# Altium PCB board.PcbDoc
Units mm, origin at the board's own origin, x right, y up, seen from the top; angles counter-clockwise.
Board outline 77.25 x 40 mm, 2 copper layers (Top Layer, Bottom Layer); 10 components, 19 nets, 89 pads, 0 vias.
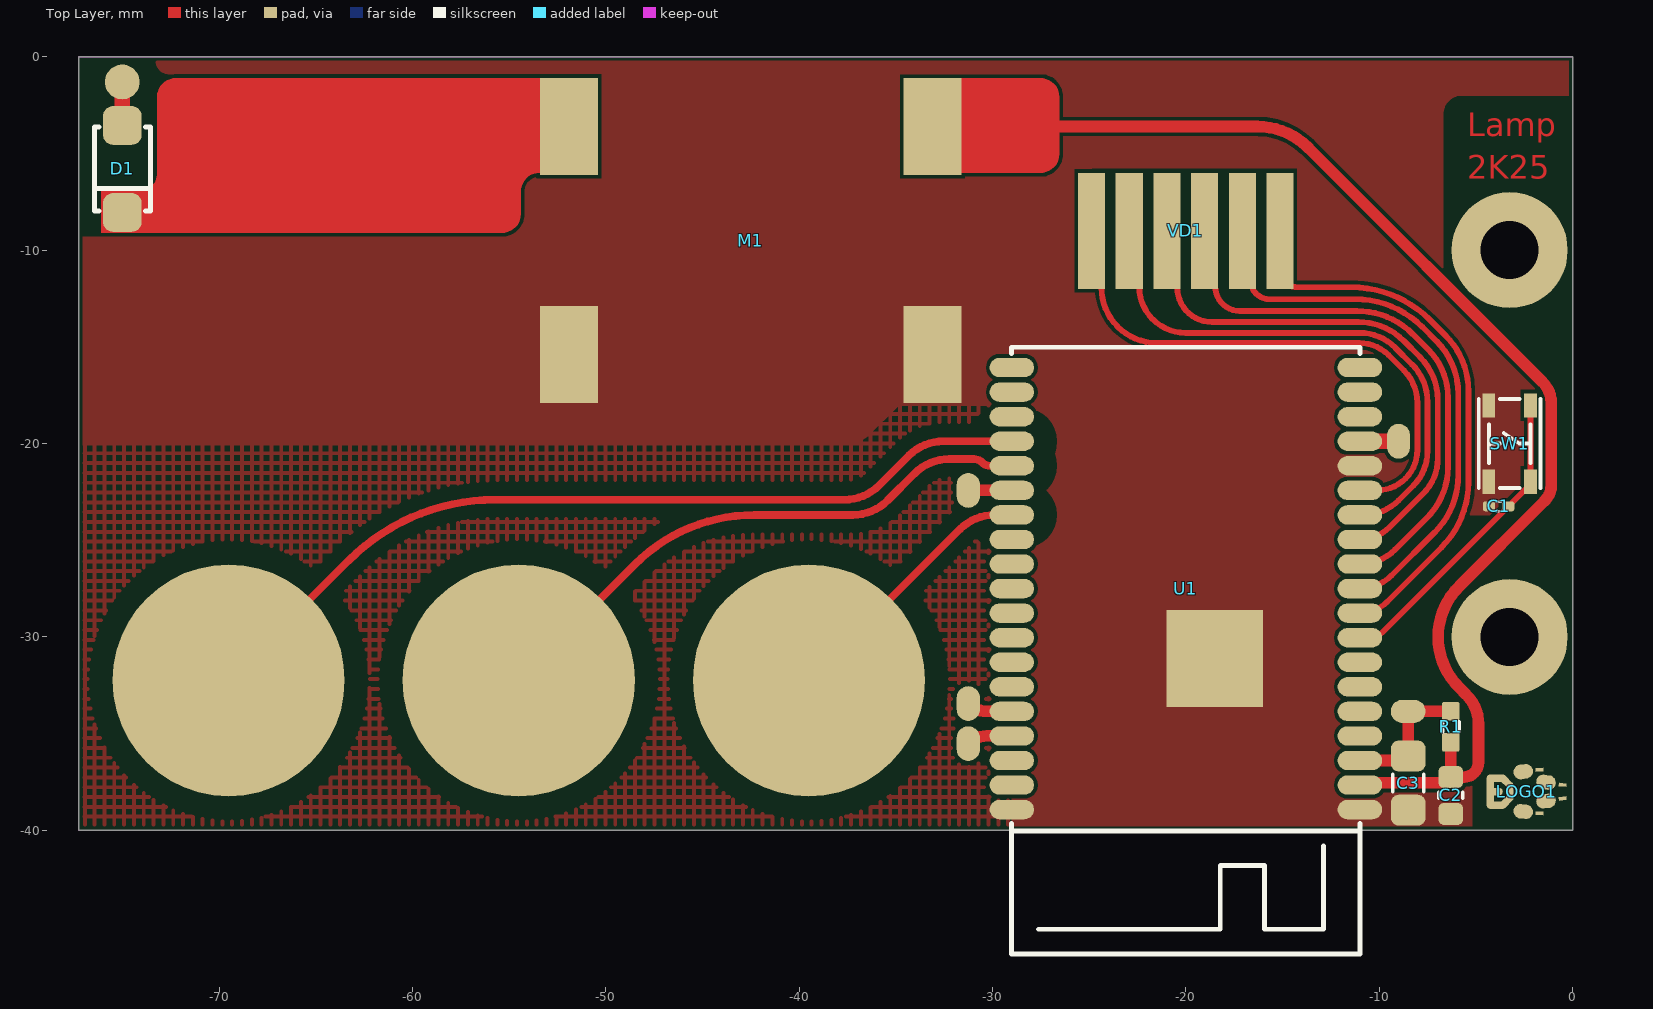
[diagram p0: Top Layer view]
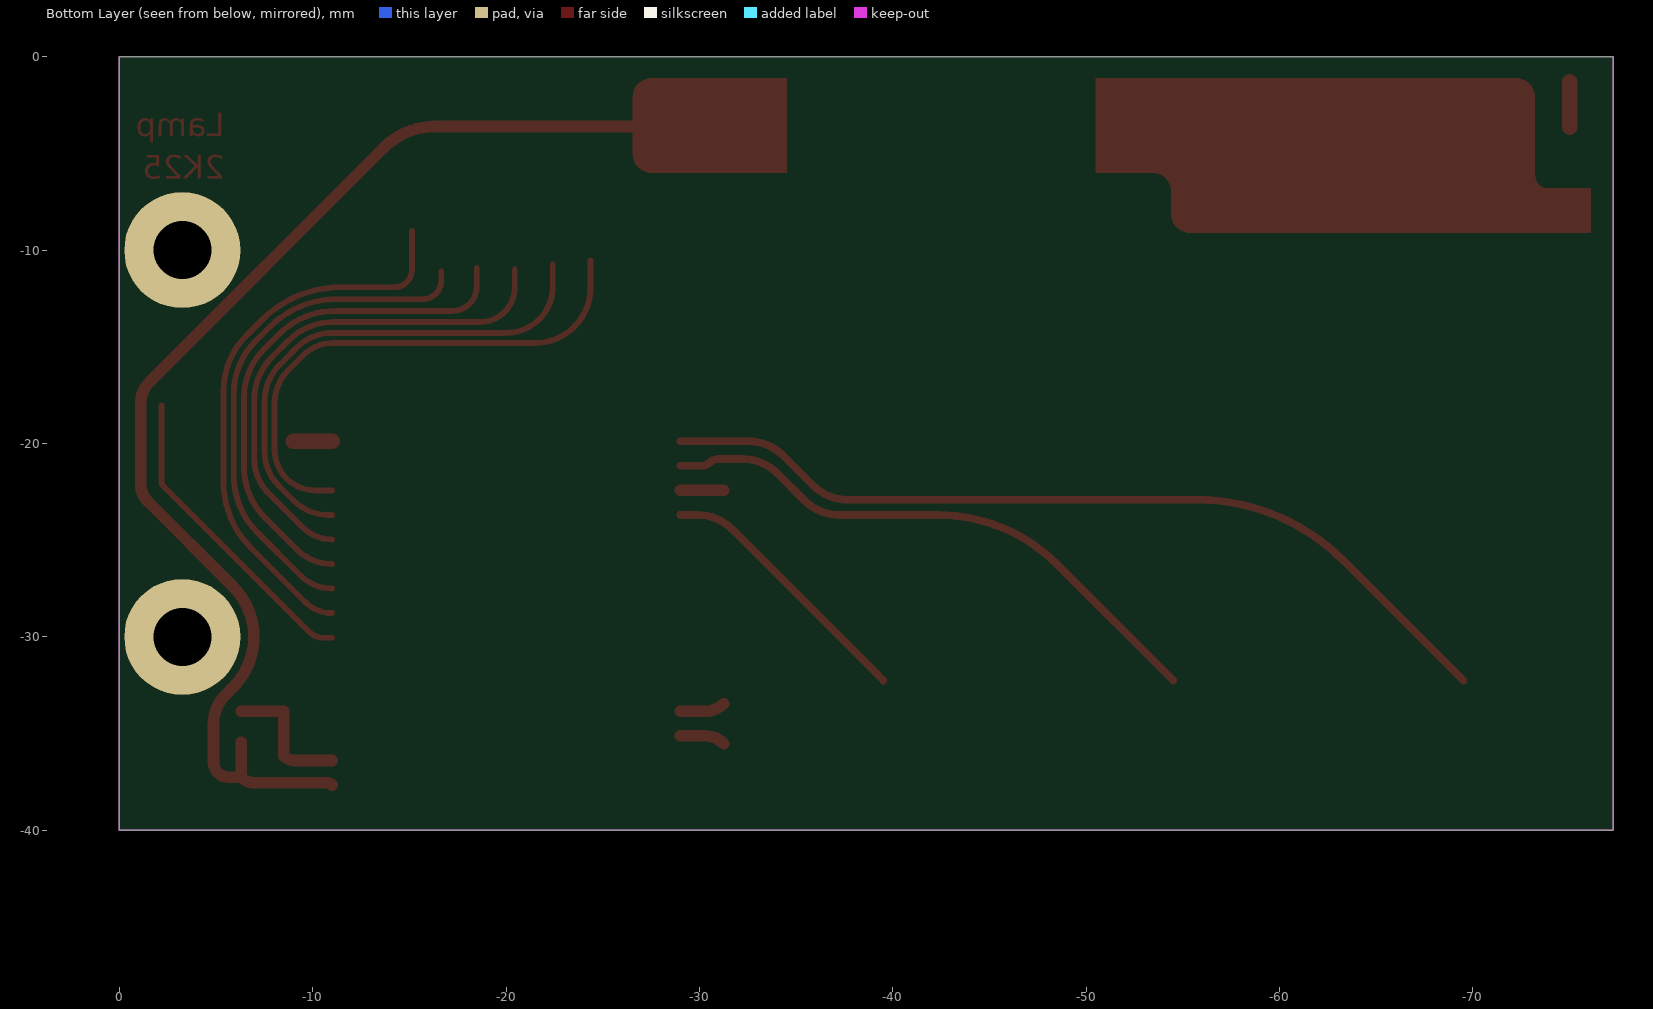
[diagram p1: Bottom Layer view, seen from below]
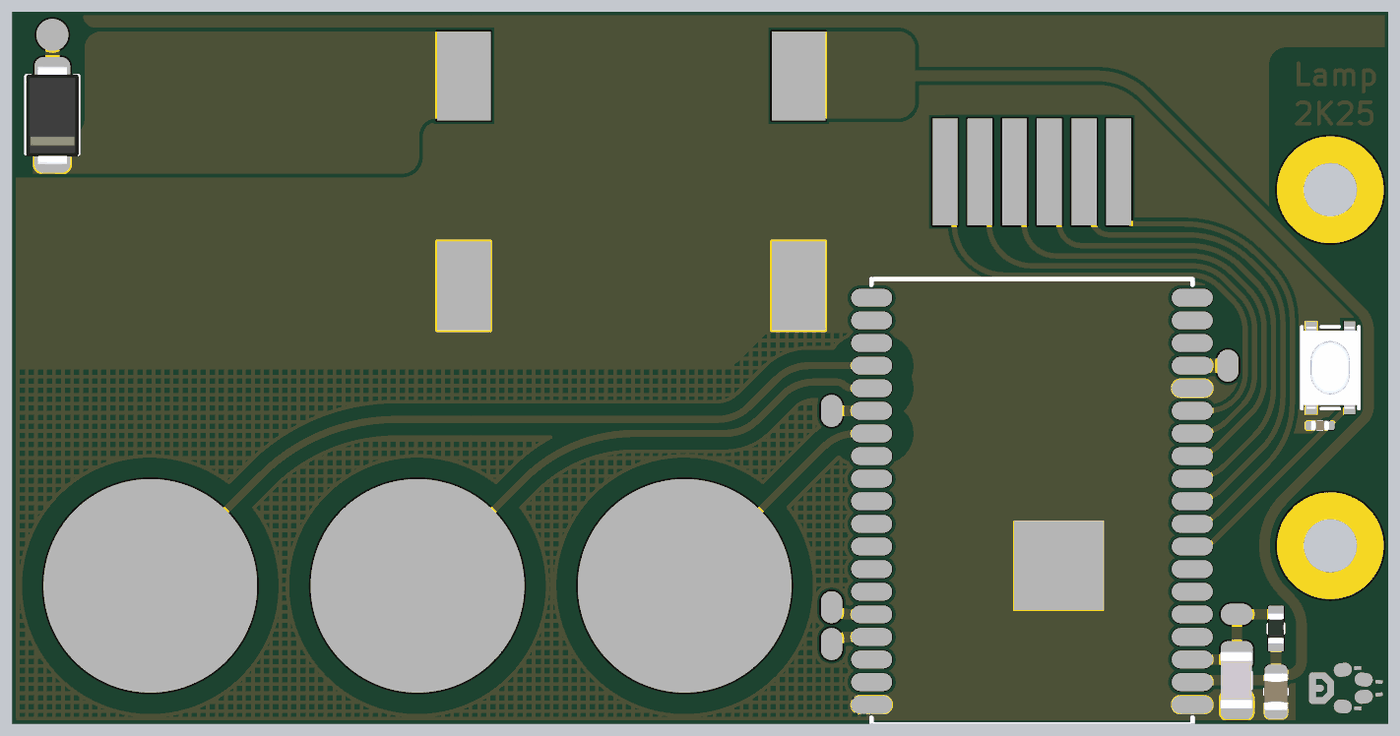
[diagram p2: 3D render of the assembled board from above, using the file's embedded part models]

## Layer stack, top to bottom
Top Solder: solder mask 0.0102, Solder Resist, Dk 3.5
Top Layer: signal copper 0.0356
Dielectric 1: dielectric 0.32, FR-4, Dk 4.8
Bottom Layer: signal copper 0.0356
Bottom Solder: solder mask 0.0102, Solder Resist, Dk 3.5

## Board outline
-77.25,-40 -77.25,0 0,0 0,-40

## Design rules (kind name [scope] priority, off if disabled: settings)
Clearance Clearance_1 [InNet('TOUCH0') vs InNet('GND')] p1: gap=0.7 ignorepadtopadclearanceinfootprint=FALSE except(1.2: SMDPad-Poly)
Clearance [All] p2: gap=0.2 ignorepadtopadclearanceinfootprint=FALSE
ComponentClearance [All] p1: gap=0.254 collisioncheckmode=3 verticalgap=0.254 showdistances=FALSE donotcheckwithout3dbody=TRUE
MinimumSolderMaskSliver [All] p1 off: minsoldermaskwidth=0.254
PolygonConnect [All] p1: connectstyle=Direct reliefconductorwidth=0.254 reliefentries=4 polygonreliefangle="90 Angle" airgapwidth=0.254
RoutingVias [All] p1 off: holewidth=0.711 width=1.27 viastyle="Through Hole" minholewidth=0.711 minwidth=1.27 maxholewidth=0.711 maxwidth=1.27
SilkToSilkClearance [All] p1 off: silktosilkclearance=0.254
SilkToSolderMaskClearance [IsPad] p1 off: minsilkscreentomaskgap=0.254 clearancetoexposedcopper=TRUE
SolderMaskExpansion [All] p1: expansion=0.102 istentingtop=FALSE
SupplyNets "Schematic Supply Nets_6" [InNet('Vin')] p1: voltage=0.000
SupplyNets "Schematic Supply Nets_4" [InNet('3V3')] p2: voltage=0.000
SupplyNets "Schematic Supply Nets_3" [InNet('GND')] p3: voltage=0.000
Width [All] p1: maxlimit=12.7 minlimit=0.051 preferedwidth=0.254
26 further rules are at their usual default settings.

## Components (designator, comment, footprint, x,y, rotation, side; value= is the part's Value field where it differs from the comment)
C1 "100n" C0402 -3.825,-23.25 r0 top
C2 "10uF" C0805 -6.3,-38.2 r90 top
C3 "1uF" C1206 -8.5,-37.56 r90 top
D1 "S1M" SMA -75,-5.8 r270 top
LOGO1 "LOGO" LOGO -4.25,-38 r270 top
M1 "MP1584" MP1584_module -53.5,-18 r0 top
R1 "1k" R0603 -6.3,-34.65 r90 top
SW1 "PTS810SJS250" BTN_PTS810 -3.25,-20 r90 top
U1 "ESP32-WROVER-E-N16R8" WIFIM-SMD_39P-L31.4-W18.0-P1.27 -20,-27.5 r180 top
VD1 "L13B07AWRG" L13B07AWRG -20,-12 r0 top

## Footprints (in the part's own frame and the unit in brackets; to place one, negate y for a bottom-side part, rotate by r counter-clockwise, add the part's x,y. Pads: shape width x height; smd on the part's side, far side on the other; paste and mask are expansions set on the pad)
BTN_PTS810 [mm]
  rect 1.25x0.65 smd mask+0.05: 1(-1.975,1.075) 2(1.975,1.075) 3(-1.975,-1.075) 4(1.975,-1.075)
  silkscreen extent -2.3,-1.6 2.3,1.6, body extent -2.3,-1.6 2.3,1.6, height 2.5
C0402 [mm] "Chip Capacitor Body"
  rrect50% 0.635x0.508 smd mask+0.05: 1(-0.5,0) 2(0.5,0)
  silkscreen extent -0.13,-0.25 0.13,0.25, body extent -0.52,-0.27 0.53,0.28, height 0.55
C0805 [mil] "Chip Capacitor"
  rrect50% 45x50 smd mask+1.97: 1(-37.5,0) 2(37.5,0)
  silkscreen extent -6,-25 6,25, body extent -41,-27 41,27, height 53
C1206 [mm] "Chip Capacitor"
  rrect50% 1.6x1.8 smd: 1(-1.4,0) 2(1.4,0)
  silkscreen extent -0.45,-0.8 0.45,0.8, body extent -1.6,-0.88 1.6,0.92, height 1.6
L13B07AWRG [mm]
  rect 1.4x6 smd: 1(-4.875,3) 2(-2.925,3) 3(-0.975,3) 4(0.975,3) 5(2.925,3) 6(4.875,3)
  body extent -6.55,3.85 6.55,10.95, height 4.5
LOGO [mil]
  rect 15.75x7.87 smd rot 93 mask+4: ""(-44.55,100)
  oval 30x40 smd rot 8 mask+4: ""(-40.55,67)
  oval 15x39.5 smd mask+4: ""(-27.5,12.5) ""(27.5,12.5)
  oval 15x36.21 smd rot 135 mask+4: ""(-20,32.5)
  oval 30x40 smd rot 173 mask+4: ""(-18.99,113.27)
  rect 15.75x7.87 smd rot 83 mask+4: ""(-13.91,147.15)
  oval 39.5x15 smd mask+4: ""(0,40)
  oval 15x32.5 smd mask+4: ""(0,9)
  oval 70x15 smd mask+4: ""(0,0)
  rect 15.75x7.87 smd rot 97 mask+4: ""(13.91,147.15)
  oval 30x40 smd rot 7 mask+4: ""(18.99,113.27)
  oval 15x36.21 smd rot 45 mask+4: ""(20,32.5)
  oval 30x40 smd rot 172 mask+4: ""(40.55,67)
  rect 15.75x7.87 smd rot 87 mask+4: ""(44.55,100)
MP1584_module [mm]
  rect 3x5 smd: 1(1.602,14.398) 2(1.602,2.602) 2(20.398,2.602) 3(20.398,14.398)
  body extent 0,0 22,17, height 0.25
R0603 [mil] "Chip Resistor; Body 1.6 x 0.8 mm (LxW typ)"
  rrect20% 38x35.43 smd mask+1.97: 1(-31.5,0) 2(31.5,0)
  silkscreen extent -10,-17 10,17, body extent -33,-18 33,18, height 22
SMA [mm] "SMA(DO-214AC)"
  rrect50% 2x2 smd: 1(-2.25,0) 2(2.25,0)
  silkscreen extent -2.17,-1.45 2.17,1.45, body extent -2.78,-1.48 2.83,1.48, height 2.9
WIFIM-SMD_39P-L31.4-W18.0-P1.27 [mm]
  oval 2.3x1 smd paste+0 mask+0.051: 1(-9,11.43) 2(-9,10.16) 3(-9,8.89) 4(-9,7.62) 5(-9,6.35) 6(-9,5.08) 7(-9,3.81) 8(-9,2.54) 9(-9,1.27) 10(-9,0) 11(-9,-1.27) 12(-9,-2.54) 13(-9,-3.81) 14(-9,-5.08) 15(-9,-6.35) 16(-9,-7.62) 17(-9,-8.89) 18(-9,-10.16) 19(-9,-11.43) 20(9,-11.43) 21(9,-10.16) 22(9,-8.89) 23(9,-7.62) 24(9,-6.35) 25(9,-5.08) 26(9,-3.81) 27(9,-2.54) 28(9,-1.27) 29(9,0) 30(9,1.27) 31(9,2.54) 32(9,3.81) 33(9,5.08) 34(9,6.35) 35(9,7.62) 36(9,8.89) 37(9,10.16) 38(9,11.43)
  rect 5x5 smd paste+0 mask+0.051: 39(-1.5,3.62)
  silkscreen extent -9.02,-12.48 9.02,18.89

## Part data
C1 C3: library part Cap
C2: library part CAP
D1: library part US1M-13-F
M1: library part "Header 3"
R1: library part RES, "1k 0603"
SW1: library part Component_1, LCSC part number=C221896, P/N=PTS810SJK250SMTRLFS
U1: JLCPCB Part Class="Extended Part", LCSC Part Name="通用型Wi-Fi+BT+BLE MCU模组", Manufacturer=ESPRESSIF(乐鑫), Add into BOM=yes, Convert to PCB=yes, Datasheet=https://atta.szlcsc.com/upload/public/pdf/source/20241030/69A66968DE36EDB45130F1579BF46A5B.pdf, Device=ESP32-WROVER-E-N16R8, Manufacturer Part=ESP32-WROVER-E-N16R8, Supplier=LCSC, Supplier Footprint=SMD,18x31.4mm, Supplier Part=C529589, Symbol=ESP32-WROVER-E(16MB)

## Free pads (board coordinates)
  round 12 smd: 9(-69.5,-32.25) 9(-54.5,-32.25) 9(-39.5,-32.25)
  round 6 hole 3: M(-3.25,-30) M(-3.25,-10)
  round 1.8 smd: ""(-75,-1.3)
  oval 1.2x1.8 smd: ""(-31.25,-35.52) ""(-31.25,-33.45) ""(-31.25,-22.42) ""(-9,-19.88)
  oval 1.8x1.2 smd: ""(-8.5,-33.85)

## Nets (pads, with @x,y where several pads share a name; then routed paths per layer and width w, separated by ;. In a path a pad name is that pad's centre, name@x,y a point inside that pad or via, vN(x,y) a via of type N, cw(c..) or ccw(c..) an arc to the next point about the centre after c; other vN are vias at no path point)
3V3: C2.2 M1.3 R1.1 U1.2 | length 68
  Top Layer w0.6: M1.3 -16.308,-3.602 cw(c-16.308,-7.315) -13.682,-4.689 -1.545,-16.827 cw(c-2.619,-17.901) -1.1,-17.901 -1.1,-22.154 cw(c-2.219,-22.154) -1.428,-22.945 -5.866,-27.384 ccw(c-3.25,-30) -5.866,-32.616 -5.494,-32.989 cw(c-7.018,-34.513) -4.862,-34.513 -4.862,-36.487 cw(c-5.623,-36.487) -5.623,-37.247 C2.2 ; U1.2 cw(c-10.732,-37.928) -10.732,-37.549 -7.001,-37.549 ccw(c-7.001,-36.584) -6.319,-37.266 C2.2 ; R1.1 C2.2
BTN: C1.2 SW1.3 SW1.4 U1.8 | length 16.1
  Top Layer w0.3: U1.8 -10.515,-30.04 ccw(c-10.515,-29.075) -9.832,-29.757 C1.2 -2.263,-22.188 ccw(c-2.477,-21.975) SW1.3 SW1.4
D0: U1.9 VD1.6 | length 29.1
  Top Layer w0.3: VD1.6 -15.125,-11.009 ccw(c-14.217,-11.009) -14.217,-11.917 -11.433,-11.917 cw(c-11.433,-17.639) -7.388,-13.593 -6.582,-14.399 cw(c-9.474,-17.291) -5.383,-17.291 ; U1.9 ccw(c-11,-26.784) -9.595,-28.188 -6.784,-25.376 ccw(c-10.164,-21.996) -5.383,-21.996 -5.383,-17.291
D1: U1.10 VD1.5 | length 26.8
  Top Layer w0.3: VD1.5@-16.647,-11.105 -16.647,-11.568 ccw(c-15.682,-11.568) -15.682,-12.533 -11.251,-12.533 cw(c-11.251,-17.46) -7.767,-13.976 -7.033,-14.709 cw(c-9.74,-17.416) -5.912,-17.416 -5.912,-21.647 cw(c-10.076,-21.647) -7.132,-24.591 -9.362,-26.821 cw(c-11,-25.183) U1.10
D2: U1.11 VD1.4 | length 27
  Top Layer w0.3: VD1.4@-18.482,-10.925 -18.482,-11.869 ccw(c-17.21,-11.869) -17.21,-13.141 -11.156,-13.141 cw(c-11.156,-17.232) -8.263,-14.339 -7.463,-15.14 cw(c-9.931,-17.608) -6.441,-17.608 -6.441,-21.196 cw(c-10.186,-21.196) -7.538,-23.844 -9.179,-25.486 cw(c-10.975,-23.69) -10.975,-26.23 U1.11
D3: U1.12 VD1.3 | length 26.8
  Top Layer w0.3: VD1.3@-20.444,-11.003 -20.444,-11.924 ccw(c-18.649,-11.924) -18.649,-13.718 -11.07,-13.718 cw(c-11.07,-17.024) -8.732,-14.686 -7.892,-15.527 cw(c-10.12,-17.755) -6.969,-17.755 -6.969,-20.776 cw(c-9.509,-20.776) -7.713,-22.572 -9.465,-24.324 cw(c-11,-22.79) U1.12
D4: U1.13 VD1.2 | length 27.2
  Top Layer w0.3: VD1.2@-22.411,-10.732 -22.411,-11.88 ccw(c-20.017,-11.88) -20.017,-14.275 -11.012,-14.275 cw(c-11.012,-16.883) -9.167,-15.039 -8.301,-15.905 cw(c-10.241,-17.845) -7.498,-17.845 -7.498,-20.4 cw(c-10.001,-20.4) -8.231,-22.171 -9.007,-22.946 cw(c-10.803,-21.15) -10.803,-23.69 U1.13
D5: U1.14 VD1.1 | length 27.6
  Top Layer w0.3: VD1.1@-24.366,-10.534 -24.366,-11.931 ccw(c-21.501,-11.931) -21.501,-14.796 -11.028,-14.796 cw(c-11.028,-16.923) -9.524,-15.419 -8.717,-16.226 cw(c-10.384,-17.893) -8.026,-17.893 -8.026,-20.33 cw(c-10.116,-20.33) -10.116,-22.42 U1.14
EN: C3.2 pad.@-8.5,-33.85 R1.2 U1.3 | length 7.1
  Top Layer w0.6: U1.3 -9.056,-36.39 ccw(c-9.056,-35.604) C3.2 -8.5,-33.85 R1.2
ESP_PRG: pad.@-31.25,-22.42 U1.25 | length 2.3
  Top Layer w0.6: pad.@-31.25,-22.42 U1.25
GND: C1.1 C2.1 C3.1 M1.2 SW1.1 SW1.2 U1.1 U1.15 U1.38 U1.39
NetD1_2: D1.2 M1.1
PWM: pad.@-9,-19.88 U1.16 | length 2
  Top Layer w0.8: U1.16 pad.@-9,-19.88
RXD: pad.@-31.25,-33.45 U1.34 | length 2.4
  Top Layer w0.6: pad.@-31.25,-33.45 ccw(c-30.284,-32.484) -30.284,-33.85 U1.34
TOUCH0: pad.9@-39.5,-32.25 U1.26 | length 13.9
  Top Layer w0.4: pad.9@-39.5,-32.25 -31.684,-24.434 cw(c-29.888,-26.23) -29.888,-23.69 U1.26
TOUCH2: pad.9@-54.5,-32.25 U1.24 | length 29.7
  Top Layer w0.4: pad.9@-54.5,-32.25 -48.504,-26.254 cw(c-42.314,-32.445) -42.314,-23.69 -37.222,-23.69 ccw(c-37.222,-21.15) -35.426,-22.946 -34.024,-21.544 cw(c-32.228,-23.34) -32.228,-20.8 -30.983,-20.8 cw(c-30.983,-21.483) -30.5,-21 ccw(c-30.138,-20.638) -30.138,-21.15 U1.24
TOUCH3: pad.9@-69.5,-32.25 U1.23 | length 44.9
  Top Layer w0.4: pad.9@-69.5,-32.25 -63.294,-26.044 cw(c-55.703,-33.635) -55.703,-22.9 -37.652,-22.9 ccw(c-37.652,-20.36) -35.856,-22.156 -34.324,-20.624 cw(c-32.528,-22.42) -32.528,-19.88 U1.23
TXD: pad.@-31.25,-35.52 U1.35 | length 2.4
  Top Layer w0.6: pad.@-31.25,-35.52 cw(c-30.284,-36.486) -30.284,-35.12 U1.35
Vin: D1.1 pad.@-75,-1.3 | length 2.4
  Top Layer w0.8: D1.1@-75,-3.65 pad.@-75,-1.3
pads on no net: LOGO1. U1.4 U1.5 U1.6 U1.7 U1.17 U1.18 U1.19 U1.20 U1.21 U1.22 U1.27 U1.28 U1.29 U1.30 U1.31 U1.32 U1.33 U1.36 U1.37

## Polygon pours and split planes (outlines as drawn)
GND on Top Layer "GND_L01_P001" (solid, remove dead copper, pour order 1): 0,0 -77.25,0 -77.25,-20.1 -37.81,-20.1 ccw(c-37.81,-17.942) -36.284,-19.468 -35.029,-18.213 cw(c-34.256,-18.986) -34.256,-17.893 -29,-17.893 -29,-40 0,-40
GND on Top Layer "GND_L01_P000" (hatched 90Degree grid 0.508 track 0.203, remove dead copper, pour order 0): -77.25,-40 -28.5,-40 -28.5,-17.232 -77.25,-17.232

## Keep-outs
Keep-Out Layer:
  the board outline again, w0

## Other copper
Top Layer:
  pour cut-out: -77.25,-9.304 -77.25,0 -73.283,0 -73.283,-0.204 ccw(c-72.587,-0.204) -72.587,-0.9 -72.37,-0.9 -72.37,-9.304
  pour cut-out: -24.875,-9 -24.875,-5.786 -15.125,-5.786 -15.125,-9
  region net 3V3: -26.55,-5.035 -26.55,-2.065 ccw(c-27.515,-2.065) -27.515,-1.1 -34.5,-1.1 -34.5,-6 -27.515,-6 ccw(c-27.515,-5.035)
  region net NetD1_2: -55.365,-9.1 ccw(c-55.365,-8.135) -54.4,-8.135 -54.4,-6.965 cw(c-53.435,-6.965) -53.435,-6 -50.5,-6 -50.5,-1.1 -72.235,-1.1 ccw(c-72.235,-2.065) -73.2,-2.065 -73.2,-6.1 cw(c-73.9,-6.1) -73.9,-6.8 -76.1,-6.8 -76.1,-9.1
  pour cut-out: -6.682,-2.965 cw(c-5.716,-2.965) -5.716,-2 0.6,-2 0.6,-13.5 -4.972,-13.5 -6.682,-11.79
  pour cut-out: -5.2,-40.303 2.1,-40.303 2.1,-35.553 -5.2,-35.553
  pour cut-out: -6,-23.7 -3.074,-23.7 -3.074,-24.96 -6.784,-24.96 -6.784,-23.69 -5.951,-23.69
  text "Lamp" at -5.449,-4.1 h1.2
  text "2K25" at -5.449,-6.3 h1.2